# EAGLE board CT_schematic (EAGLE 7.6.0)

Size 100 x 80 mm. Coordinates in mm from the lower left corner, seen from the top.
Outline: 0,0 100,0 100,80 0,80 0,0
Copper layers (1*16): Top 0.035mm / dielectric 1.5mm / Bottom 0.035mm
Design rules "default": minimum track width 10mil, minimum drill 24mil, track to track 8mil, track to pad 8mil, pad to pad 8mil, via to via 8mil, smd to smd 8mil, copper to edge 40mil, drill to drill 8mil, minimum pad ring 10mil, minimum via ring 8mil, stop-mask expansion 4mil, vias tented up to drill 0mil, thermal gap 10mil

## Footprints (pad centres in the part's own frame; a part is rotated, then mirrored left to right if it is on the bottom)
C0603 = smd 0.8 x 0.8: 1 -0.762,0; 2 0.762,0
C0402 = smd 0.5 x 0.5: 1 -0.508,0; 2 0.508,0
C0805 = smd 1.2 x 1.3: 1 -1.016,0; 2 1.016,0
C1210 = smd 1.2 x 2.5: 1 -1.524,0; 2 1.524,0
C1206 = smd 1.3 x 1.6: 1 -1.524,0; 2 1.524,0
EXV-9H = smd 3.505 x 1.676: 1 -2.857,0; 2 2.857,0
L0603 = smd 0.8 x 0.8: 1 -0.762,0; 2 0.762,0
PJ-037B_PACKAGE = drill 3.7 square: 1 12,0 | drill 3.2 square: 2 6,0
R0603 = smd 0.8 x 0.8: 1 -0.762,0; 2 0.762,0
LFBGA144 = smd 0.52 x 0.52: A1 -4.4,4.4; A2 -3.6,4.4; A3 -2.8,4.4; A4 -2,4.4; A5 -1.2,4.4; A6 -0.4,4.4; A7 0.4,4.4; A8 1.2,4.4; A9 2,4.4; A10 2.8,4.4; A11 3.6,4.4; A12 4.4,4.4; B1 -4.4,3.6; B2 -3.6,3.6; B3 -2.8,3.6; B4 -2,3.6; B5 -1.2,3.6; B6 -0.4,3.6; B7 0.4,3.6; B8 1.2,3.6; B9 2,3.6; B10 2.8,3.6; B11 3.6,3.6; B12 4.4,3.6; C1 -4.4,2.8; C2 -3.6,2.8; C3 -2.8,2.8; C4 -2,2.8; C5 -1.2,2.8; C6 -0.4,2.8; C7 0.4,2.8; C8 1.2,2.8; C9 2,2.8; C10 2.8,2.8; C11 3.6,2.8; C12 4.4,2.8; D1 -4.4,2; D2 -3.6,2; D3 -2.8,2; D4 -2,2; D5 -1.2,2; D6 -0.4,2; D7 0.4,2; D8 1.2,2; D9 2,2; D10 2.8,2; D11 3.6,2; D12 4.4,2; E1 -4.4,1.2; E2 -3.6,1.2; E3 -2.8,1.2; E4 -2,1.2; E5 -1.2,1.2; E6 -0.4,1.2; E7 0.4,1.2; E8 1.2,1.2; E9 2,1.2; E10 2.8,1.2; E11 3.6,1.2; E12 4.4,1.2; F1 -4.4,0.4; F2 -3.6,0.4; F3 -2.8,0.4; F4 -2,0.4; F5 -1.2,0.4; F6 -0.4,0.4; F7 0.4,0.4; F8 1.2,0.4; F9 2,0.4; F10 2.8,0.4; F11 3.6,0.4; F12 4.4,0.4; G1 -4.4,-0.4; G2 -3.6,-0.4; G3 -2.8,-0.4; G4 -2,-0.4; G5 -1.2,-0.4; G6 -0.4,-0.4; G7 0.4,-0.4; G8 1.2,-0.4; G9 2,-0.4; G10 2.8,-0.4; G11 3.6,-0.4; G12 4.4,-0.4; H1 -4.4,-1.2; H2 -3.6,-1.2; H3 -2.8,-1.2; H4 -2,-1.2; H5 -1.2,-1.2; H6 -0.4,-1.2; H7 0.4,-1.2; H8 1.2,-1.2; H9 2,-1.2; H10 2.8,-1.2; H11 3.6,-1.2; H12 4.4,-1.2; J1 -4.4,-2; J2 -3.6,-2; J3 -2.8,-2; J4 -2,-2; J5 -1.2,-2; J6 -0.4,-2; J7 0.4,-2; J8 1.2,-2; J9 2,-2; J10 2.8,-2; J11 3.6,-2; J12 4.4,-2; K1 -4.4,-2.8; K2 -3.6,-2.8; K3 -2.8,-2.8; K4 -2,-2.8; K5 -1.2,-2.8; K6 -0.4,-2.8; K7 0.4,-2.8; K8 1.2,-2.8; K9 2,-2.8; K10 2.8,-2.8; K11 3.6,-2.8; K12 4.4,-2.8; L1 -4.4,-3.6; L2 -3.6,-3.6; L3 -2.8,-3.6; L4 -2,-3.6; L5 -1.2,-3.6; L6 -0.4,-3.6; L7 0.4,-3.6; L8 1.2,-3.6; L9 2,-3.6; L10 2.8,-3.6; L11 3.6,-3.6; L12 4.4,-3.6; M1 -4.4,-4.4; M2 -3.6,-4.4; M3 -2.8,-4.4; M4 -2,-4.4; M5 -1.2,-4.4; M6 -0.4,-4.4; M7 0.4,-4.4; M8 1.2,-4.4; M9 2,-4.4; M10 2.8,-4.4; M11 3.6,-4.4; M12 4.4,-4.4
SAMTEC_FTSH-105-01-L-DV-K = smd 0.762 x 2.794: 1 -2.54,-2.032; 2 -2.54,2.032; 3 -1.27,-2.032; 4 -1.27,2.032; 5 0,-2.032; 6 0,2.032; 7 1.27,-2.032; 8 1.27,2.032; 9 2.54,-2.032; 10 2.54,2.032
SOIC-8 = smd 1.6 x 0.6: 1 -2.7,1.905 | smd 1.55 x 0.6: 2 -2.7,0.635; 3 -2.7,-0.635; 4 -2.7,-1.905; 5 2.7,-1.905; 6 2.7,-0.635; 7 2.7,0.635; 8 2.7,1.905
182-009-MALE = drill 1.194 pad 1.524 octagon: 1 -5.537,10.923; 2 -2.769,10.923; 3 0,10.923; 4 2.769,10.923; 5 5.537,10.923; 6 -4.153,8.08; 7 -1.384,8.08; 8 1.384,8.08; 9 4.153,8.08 | hole 3.048: -12.446,9.501; 12.446,9.501
MOLEX_47219-2001 = smd 0.8 x 1.5: 1 3.2,-2.1; 2 2.1,-2.1; 3 1,-2.1; 4 -0.1,-2.1; 5 -1.2,-2.1; 6 -2.3,-2.1; 7 -3.4,-2.1; 8 -4.5,-2.1 | smd 1.5 x 2.05: G1 6.875,-4.7; G2 6.875,3.6; G3 -6.875,3.6; G4 -6.875,-4.7
FCI_10118193-0001LF = smd 0.4 x 1.35: 1 -1.3,2.675; 2 -0.65,2.675; 3 0,2.675; 4 0.65,2.675; 5 1.3,2.675 | smd 1.6 x 1.4: 6 -3.2,2.45; 7 3.2,2.45 | smd 1.9 x 1.9: 8 -1.2,0; 9 1.2,0 | hole 0.5: -3.3,0; 3.3,0
SOT143B = smd 1 x 0.7: 1 -0.75,-1 | smd 0.6 x 0.7: 2 0.95,-1; 3 0.95,1; 4 -0.95,1
QFN-28 = smd 0.813 x 0.305: 1 -2.451,1.5; 2 -2.451,1; 3 -2.451,0.5; 4 -2.451,0; 5 -2.451,-0.5; 6 -2.451,-1; 7 -2.451,-1.5; 15 2.451,-1.5; 16 2.451,-1; 17 2.451,-0.5; 18 2.451,0; 19 2.451,0.5; 20 2.451,1; 21 2.451,1.5 | smd 0.305 x 0.813: 8 -1.5,-2.451; 9 -1,-2.451; 10 -0.5,-2.451; 11 0,-2.451; 12 0.5,-2.451; 13 1,-2.451; 14 1.5,-2.451; 22 1.5,2.451; 23 1,2.451; 24 0.5,2.451; 25 0,2.451; 26 -0.5,2.451; 27 -1,2.451; 28 -1.5,2.451 | smd 3.607 x 3.607: 29 0,0
SJ-43515TS-SMT-TR = smd 2.2 x 3: 1 0.6,-7.4; 4 3.4,-7.4 | smd 3 x 3: 2 12.8,-7.4; 5 17,-3 | smd 2 x 3: 3 5.3,0; 6 2.5,0 | drill 1.8: P$7 4.5,-3.69; P$8 11.54,-3.69
ABLS-12.288MHZ-B4-T = smd 5.6 x 2.8: 1 -3.81,0; 2 5.69,0
ASEK = smd 1.4 x 1: 1 -1.1,-0.8; 2 1.1,-0.8; 3 1.1,0.8; 4 -1.1,0.8
ASFL1 = smd 1.7 x 1.5: 1 -1.27,-1.1; 2 1.27,-1.1; 3 1.27,1.1; 4 -1.27,1.1
WSON-8 = smd 0.3 x 0.6: 1 -0.75,0; 2 0.05,0; 3 0.85,0; 4 1.65,0; 5 1.65,3.8; 6 0.85,3.8; 7 0.05,3.8; 8 -0.75,3.8 | smd 3 x 2.6: PAD 0.45,1.9
SON-6 = smd 0.55 x 0.3: 1 -0.355,0.5 | smd 0.52 x 0.3: 2 -0.37,0; 3 -0.37,-0.5; 4 0.37,-0.5; 5 0.37,0; 6 0.37,0.5
SW_4-1437565-2 = smd 1.4 x 2.1: 1 -2.23,4.55; 2 -2.23,-4.55; 3 2.23,4.55; 4 2.23,-4.55
LGM67K-G1J2-24-Z = smd 0.8 x 1.4: A -2,0; C 0,0
NC7SZ125M5X = smd 1.3 x 0.7: 1 -1.3,0.95; 2 -1.3,0; 3 -1.3,-0.95; 4 1.3,-0.95; 5 1.3,0.95

## Placement (x,y rotation side)
C1  1e-06  [C0603]  -58.42,85.09 0 top  (outside the outline)
C2  1e-07  [C0603]  -62.23,85.09 0 top  (outside the outline)
C3  1e-07  [C0603]  -66.04,85.09 0 top  (outside the outline)
C4  1e-07  [C0603]  -69.85,85.09 0 top  (outside the outline)
C5  1e-07  [C0603]  -73.66,85.09 0 top  (outside the outline)
C6  1e-07  [C0603]  -77.47,85.09 0 top  (outside the outline)
C7  1e-07  [C0603]  -81.28,85.09 0 top  (outside the outline)
C8  1e-07  [C0603]  -85.09,85.09 0 top  (outside the outline)
C9  1e-07  [C0603]  -88.9,85.09 0 top  (outside the outline)
C10  1e-07  [C0603]  -15.24,90.17 0 top  (outside the outline)
C11  1e-07  [C0603]  -19.05,90.17 0 top  (outside the outline)
C12  1e-07  [C0603]  -22.86,90.17 0 top  (outside the outline)
C13  1e-07  [C0603]  -26.67,90.17 0 top  (outside the outline)
C14  4.7e-06  [C0603]  -54.61,85.09 0 top  (outside the outline)
C15  1e-08  [C0603]  -30.48,90.17 0 top  (outside the outline)
C16  1e-08  [C0603]  -34.29,90.17 0 top  (outside the outline)
C17  1e-06  [C0603]  -38.1,90.17 0 top  (outside the outline)
C18  1e-07  [C0402]  -19.05,95.25 0 top  (outside the outline)
C19  1e-06  [C0603]  -41.91,90.17 0 top  (outside the outline)
C20  1e-06  [C0603]  -45.72,90.17 0 top  (outside the outline)
C21  1e-07  [C0402]  -22.86,95.25 0 top  (outside the outline)
C22  1e-05  [C0805]  -67.31,72.39 0 top  (outside the outline)
C23  2.2e-05  [C1210]  -24.13,73.66 0 top  (outside the outline)
C24  2.2e-05  [C1210]  -30.48,73.66 0 top  (outside the outline)
C25  1e-09  [C0402]  -26.67,95.25 0 top  (outside the outline)
C26  1e-09  [C0402]  -30.48,95.25 0 top  (outside the outline)
C27  1e-07  [C0402]  -34.29,95.25 0 top  (outside the outline)
C28  1e-07  [C0402]  -38.1,95.25 0 top  (outside the outline)
C29  1e-07  [C0402]  -41.91,95.25 0 top  (outside the outline)
C30  1e-07  [C0402]  -45.72,95.25 0 top  (outside the outline)
C31  1e-07  [C0402]  -49.53,95.25 0 top  (outside the outline)
C32  1e-05  [C0805]  -72.39,72.39 0 top  (outside the outline)
C33  1e-05  [C0805]  -77.47,72.39 0 top  (outside the outline)
C34  1e-05  [C0805]  -82.55,72.39 0 top  (outside the outline)
C35  1e-05  [C0805]  -87.63,72.39 0 top  (outside the outline)
C36  1e-05  [C0805]  -15.24,80.01 0 top  (outside the outline)
C37  2.2e-11  [C0402]  -88.9,90.17 0 top  (outside the outline)
C38  2.2e-11  [C0402]  -15.24,95.25 0 top  (outside the outline)
C39  1e-08  [C0402]  -53.34,95.25 0 top  (outside the outline)
C40  1e-08  [C0402]  -57.15,95.25 0 top  (outside the outline)
C41  1e-08  [C0402]  -60.96,95.25 0 top  (outside the outline)
C42  1e-05  [C1206]  -49.53,72.39 0 top  (outside the outline)
C43  1e-05  [C1210]  -36.83,73.66 0 top  (outside the outline)
C44  1e-06  [C0603]  -49.53,90.17 0 top  (outside the outline)
C45  1e-05  [C1210]  -43.18,73.66 0 top  (outside the outline)
C46  1e-07  [C0402]  -64.77,95.25 0 top  (outside the outline)
C47  0.0001  [EXV-9H]  -38.1,66.04 0 top  (outside the outline)
C48  0.0001  [EXV-9H]  -49.53,66.04 0 top  (outside the outline)
C49  1e-08  [C0402]  -68.58,95.25 0 top  (outside the outline)
C50  1e-08  [C0402]  -72.39,95.25 0 top  (outside the outline)
F1  240.0  [L0603]  -53.34,90.17 0 top  (outside the outline)
J1  PJ-037B  [PJ-037B_PACKAGE]  -55.88,44.45 0 top  (outside the outline)
R2  1000.0  [R0603]  -57.15,90.17 0 top  (outside the outline)
R4  4700.0  [R0603]  -60.96,90.17 0 top  (outside the outline)
R5  10000.0  [R0603]  -81.28,78.74 0 top  (outside the outline)
R6  10000.0  [R0603]  -86.36,78.74 0 top  (outside the outline)
R7  10000.0  [R0603]  -15.24,85.09 0 top  (outside the outline)
R8  10000.0  [R0603]  -20.32,85.09 0 top  (outside the outline)
R9  10000.0  [R0603]  -25.4,85.09 0 top  (outside the outline)
R10  5.0  [R0603]  -64.77,90.17 0 top  (outside the outline)
R11  120.0  [R0603]  -68.58,90.17 0 top  (outside the outline)
R12  100000.0  [R0603]  -20.32,78.74 0 top  (outside the outline)
R13  100000.0  [R0603]  -25.4,78.74 0 top  (outside the outline)
R14  100000.0  [R0603]  -30.48,78.74 0 top  (outside the outline)
R15  100000.0  [R0603]  -35.56,78.74 0 top  (outside the outline)
R16  100000.0  [R0603]  -40.64,78.74 0 top  (outside the outline)
R17  100000.0  [R0603]  -45.72,78.74 0 top  (outside the outline)
R18  47000.0  [R0603]  -30.48,85.09 0 top  (outside the outline)
R19  47000.0  [R0603]  -35.56,85.09 0 top  (outside the outline)
R20  47000.0  [R0603]  -40.64,85.09 0 top  (outside the outline)
R21  680.0  [R0603]  -72.39,90.17 0 top  (outside the outline)
R22  100000.0  [R0603]  -50.8,78.74 0 top  (outside the outline)
R23  2231.0  [R0603]  -76.2,90.17 0 top  (outside the outline)
R24  1000.0  [R0603]  -80.01,90.17 0 top  (outside the outline)
R25  100000.0  [R0603]  -55.88,78.74 0 top  (outside the outline)
R26  300000.0  [R0603]  -60.96,78.74 0 top  (outside the outline)
R27  100000.0  [R0603]  -66.04,78.74 0 top  (outside the outline)
R28  10000.0  [R0603]  -45.72,85.09 0 top  (outside the outline)
R29  10000.0  [R0603]  -50.8,85.09 0 top  (outside the outline)
R30  9100.0  [R0603]  -83.82,90.17 0 top  (outside the outline)
R31  680000.0  [R0603]  -71.12,78.74 0 top  (outside the outline)
R32  120000.0  [R0603]  -76.2,78.74 0 top  (outside the outline)
U1  stm32f103zdh6  [LFBGA144]  -82.55,7.62 0 top  (outside the outline)
U2  FTSH-105-01-L-DV-K  [SAMTEC_FTSH-105-01-L-DV-K]  -35.56,30.48 0 top  (outside the outline)
U3  MCP2562-E/SN  [SOIC-8]  -86.36,41.91 0 top  (outside the outline)
U4  182-009-113R531  [182-009-MALE]  -36.83,6.35 0 top  (outside the outline)
U5  0472192001  [MOLEX_47219-2001]  -62.23,8.89 0 top  (outside the outline)
U6  10118193-0001LF  [FCI_10118193-0001LF]  -73.66,55.88 0 top  (outside the outline)
U7  prtr5v0u2ax  [SOT143B]  -85.09,95.25 0 top  (outside the outline)
U8  WM8731CLSEFL  [QFN-28]  -16.51,73.66 0 top  (outside the outline)
U9  SJ-43515TS-SMT-TR  [SJ-43515TS-SMT-TR]  -68.58,31.75 0 top  (outside the outline)
U10  SJ-43515TS-SMT-TR  [SJ-43515TS-SMT-TR]  -39.37,46.99 0 top  (outside the outline)
U11  ABLS-12.288MHZ-B4-T  [ABLS-12.288MHZ-B4-T]  -67.31,66.04 0 top  (outside the outline)
U12  ASEK-32.768KHz-ECST  [ASEK]  -29.21,66.04 0 top  (outside the outline)
U13  ASFL1-25MHZ-NCS  [ASFL1]  -64.77,57.15 0 top  (outside the outline)
U14  LP3878SDX-ADJ/NOPB  [WSON-8]  -30.48,54.61 0 top  (outside the outline)
U15  LP2951ACSDX/NOPB  [WSON-8]  -48.26,54.61 0 top  (outside the outline)
U16  TPS3895ADRYR  [SON-6]  -13.97,99.06 0 top  (outside the outline)
U17  4-1437565-2  [SW_4-1437565-2]  -72.39,43.18 0 top  (outside the outline)
U18  Q65110A2395  [LGM67K-G1J2-24-Z]  -78.74,64.77 0 top  (outside the outline)
U19  nc7sz125m5x  [NC7SZ125M5X]  -54.61,72.39 0 top  (outside the outline)
U20  nc7sz125m5x  [NC7SZ125M5X]  -60.96,72.39 0 top  (outside the outline)

## Library data of the parts
C1-C50 F1 J1 R2 R4-R32 U1-U20 = circuit_tree

## Nets
CLK_CRYSTAL_U8_1: C37.1 U8.1 U11.1
CLK_CRYSTAL_U8_2: C38.1 U8.2 U11.2
CLK_U1_B1: U1.B1 U12.3
CLK_U1_D1: U1.D1 U13.3
GND: C1.2 C2.2 C3.2 C4.2 C5.2 C6.2 C7.2 C8.2 C9.2 C10.2 C11.2 C12.2 C13.2 C14.2 C15.2 C16.2 C17.2 C18.2 C19.2 C20.2 C21.2 C22.2 C26.2 C27.2 C28.2 C29.2 C30.2 C31.2 C32.2 C33.2 C34.2 C35.2 C36.2 C37.2 C38.2 C39.2 C40.2 C41.2 C42.2 C43.2 C44.2 C45.2 C46.2 C47.2 C48.2 C49.2 C50.2 J1.2 R2.2 R5.2 R9.2 R10.2 R18.2 R19.2 R20.2 R24.2 R27.2 R30.2 R32.2 U1.D2 U1.E5 U1.E6 U1.E7 U1.G4 U1.G8 U1.G9 U1.G10 U1.H5 U1.H6 U1.H7 U1.J1 U1.K1 U2.3 U2.5 U3.2 U3.8 U4.5 U5.6 U5.G1 U5.G2 U5.G3 U5.G4 U6.5 U6.6 U6.7 U6.8 U6.9 U7.1 U8.4 U8.15 U8.19 U8.25 U8.26 U8.29 U9.1 U10.1 U12.2 U13.2 U14.3 U14.PAD U15.3 U15.4 U15.PAD U16.2 U18.C U19.2 U19.3 U20.1 U20.3
NET_U1_D5: R5.1 U1.D5
NET_U1_F1: R4.1 U1.F1 U20.4
NET_U1_M1: C15.1 C16.1 C17.1 F1.1 U1.L1 U1.M1
NET_U1_M9: U18.A
NET_U1_M10: U17.3 U17.4
NET_U2_2: R8.1 U2.2
NET_U2_9: R10.1 U2.9
NET_U3_6: R11.2 U3.6
NET_U4_2: R11.2 U3.6 U4.2
NET_U4_3: R11.1 U3.7 U4.3
NET_U7_4: U6.1 U7.4
NET_U8_9: U8.9
NET_U8_20: C31.1 C36.1 U8.20
NET_U9_2: C24.1 R19.1 U9.2
NET_U9_5: C23.1 R18.1 U9.5
NET_U9_13: C23.2
NET_U9_14: C24.2
NET_U10_5: C25.1 C26.1 R20.1 R21.1 U10.5
NET_U10_21: R21.2
NET_U10_22: C25.2
NET_U14_1: C41.1 U14.1
NET_U14_6: R23.2 R24.1 U14.6
NET_U14_8: R22.1 U14.8
NET_U15_5: R25.1 U15.5
NET_U15_7: R26.2 R27.1 U15.7
NET_U16_1: R29.1 R30.1 U16.1
NET_U16_3: R31.2 R32.1 U16.3
NET_U16_4: R28.1 U16.4 U19.4 U20.2
NET_U17_1: R2.1 U17.1 U17.2
PROC_CAN_RX: U1.C5 U3.4
PROC_CAN_TX: U1.B5 U3.1
PROC_I2S2_CK: U1.M12 U8.7
PROC_I2S2_SD: U1.L12 U8.8
PROC_I2S2_WS: U1.M11 U8.9 U8.11
PROC_SDIO_CK: R13.1 U1.C10 U5.5
PROC_SDIO_CMD: R12.1 U1.E9 U5.3
PROC_SDIO_D0: R14.1 U1.F11 U5.7
PROC_SDIO_D1: R15.1 U1.E11 U5.8
PROC_SDIO_D2: R16.1 U1.B11 U5.1
PROC_SDIO_D3: R17.1 U1.B10 U5.2
PROC_SYS_JTDI: R7.1 U1.A10 U2.8
PROC_SYS_JTDO_TRACESWO: U1.A7 U2.6
PROC_SYS_TRACECLK: R9.1 U1.A3 U2.4
PROC_USB_DM: U6.2 U7.3
PROC_USB_DP: U6.3 U7.2
RST_OUT_U2_JTAG_RST_B: R6.1 U2.10 U19.1
VCC_S1_8V1: C42.1 C44.1 C47.1 C48.1 J1.1 R22.2 U14.4 U15.8
VCC_TIER1_3V3: C1.1 C2.1 C3.1 C4.1 C5.1 C6.1 C7.1 C8.1 C9.1 C10.1 C11.1 C12.1 C13.1 C14.1 C18.1 C20.1 C21.1 C22.1 C27.1 C28.1 C29.1 C30.1 C32.1 C33.1 C34.1 C35.1 C39.1 C40.1 C43.1 C46.1 C49.1 C50.1 F1.2 R4.2 R6.2 R7.2 R8.2 R12.2 R13.2 R14.2 R15.2 R16.2 R17.2 R23.1 R28.2 R29.2 R31.1 U1.C2 U1.D3 U1.F4 U1.F5 U1.F6 U1.F7 U1.F8 U1.F9 U1.F10 U1.G5 U1.G6 U1.G7 U2.1 U3.5 U5.4 U8.3 U8.5 U8.12 U8.18 U12.4 U13.4 U14.5 U16.6 U19.5 U20.5
VCC_TIER1_5V0: C19.1 C45.1 R25.2 R26.1 U3.3 U15.1

## Tracks (layer width: path | path; a pad name or v marks a point on that pad's centre or on a via)
CLK_CRYSTAL_U8_1  (2 unrouted)
CLK_CRYSTAL_U8_2  (2 unrouted)
CLK_U1_B1  (1 unrouted)
CLK_U1_D1  (1 unrouted)
GND  (108 unrouted)
NET_U1_D5  (1 unrouted)
NET_U1_F1  (2 unrouted)
NET_U1_M1  (5 unrouted)
NET_U1_M10  (1 unrouted)
NET_U2_2  (1 unrouted)
NET_U2_9  (1 unrouted)
NET_U3_6  (1 unrouted)
NET_U4_2  (2 unrouted)
NET_U4_3  (2 unrouted)
NET_U7_4  (1 unrouted)
NET_U8_20  (2 unrouted)
NET_U9_2  (2 unrouted)
NET_U9_5  (2 unrouted)
NET_U10_5  (4 unrouted)
NET_U14_1  (1 unrouted)
NET_U14_6  (2 unrouted)
NET_U14_8  (1 unrouted)
NET_U15_5  (1 unrouted)
NET_U15_7  (2 unrouted)
NET_U16_1  (2 unrouted)
NET_U16_3  (2 unrouted)
NET_U16_4  (3 unrouted)
NET_U17_1  (2 unrouted)
PROC_CAN_RX  (1 unrouted)
PROC_CAN_TX  (1 unrouted)
PROC_I2S2_CK  (1 unrouted)
PROC_I2S2_SD  (1 unrouted)
PROC_I2S2_WS  (2 unrouted)
PROC_SDIO_CK  (2 unrouted)
PROC_SDIO_CMD  (2 unrouted)
PROC_SDIO_D0  (2 unrouted)
PROC_SDIO_D1  (2 unrouted)
PROC_SDIO_D2  (2 unrouted)
PROC_SDIO_D3  (2 unrouted)
PROC_SYS_JTDI  (2 unrouted)
PROC_SYS_JTDO_TRACESWO  (1 unrouted)
PROC_SYS_TRACECLK  (2 unrouted)
PROC_USB_DM  (1 unrouted)
PROC_USB_DP  (1 unrouted)
RST_OUT_U2_JTAG_RST_B  (2 unrouted)
VCC_S1_8V1  (7 unrouted)
VCC_TIER1_3V3  (71 unrouted)
VCC_TIER1_5V0  (5 unrouted)